# Altium PCB Ender-3.PcbDoc (part 2 of 14)
Units mil, origin at the board's own origin, x right, y up, seen from the top; angles counter-clockwise.
Board outline 3970.48 x 2769.68 mil, 2 copper layers (TopLayer, BottomLayer); 146 components, 136 nets, 669 pads, 614 vias.
Unrouted connection lines stored in the file: 1.
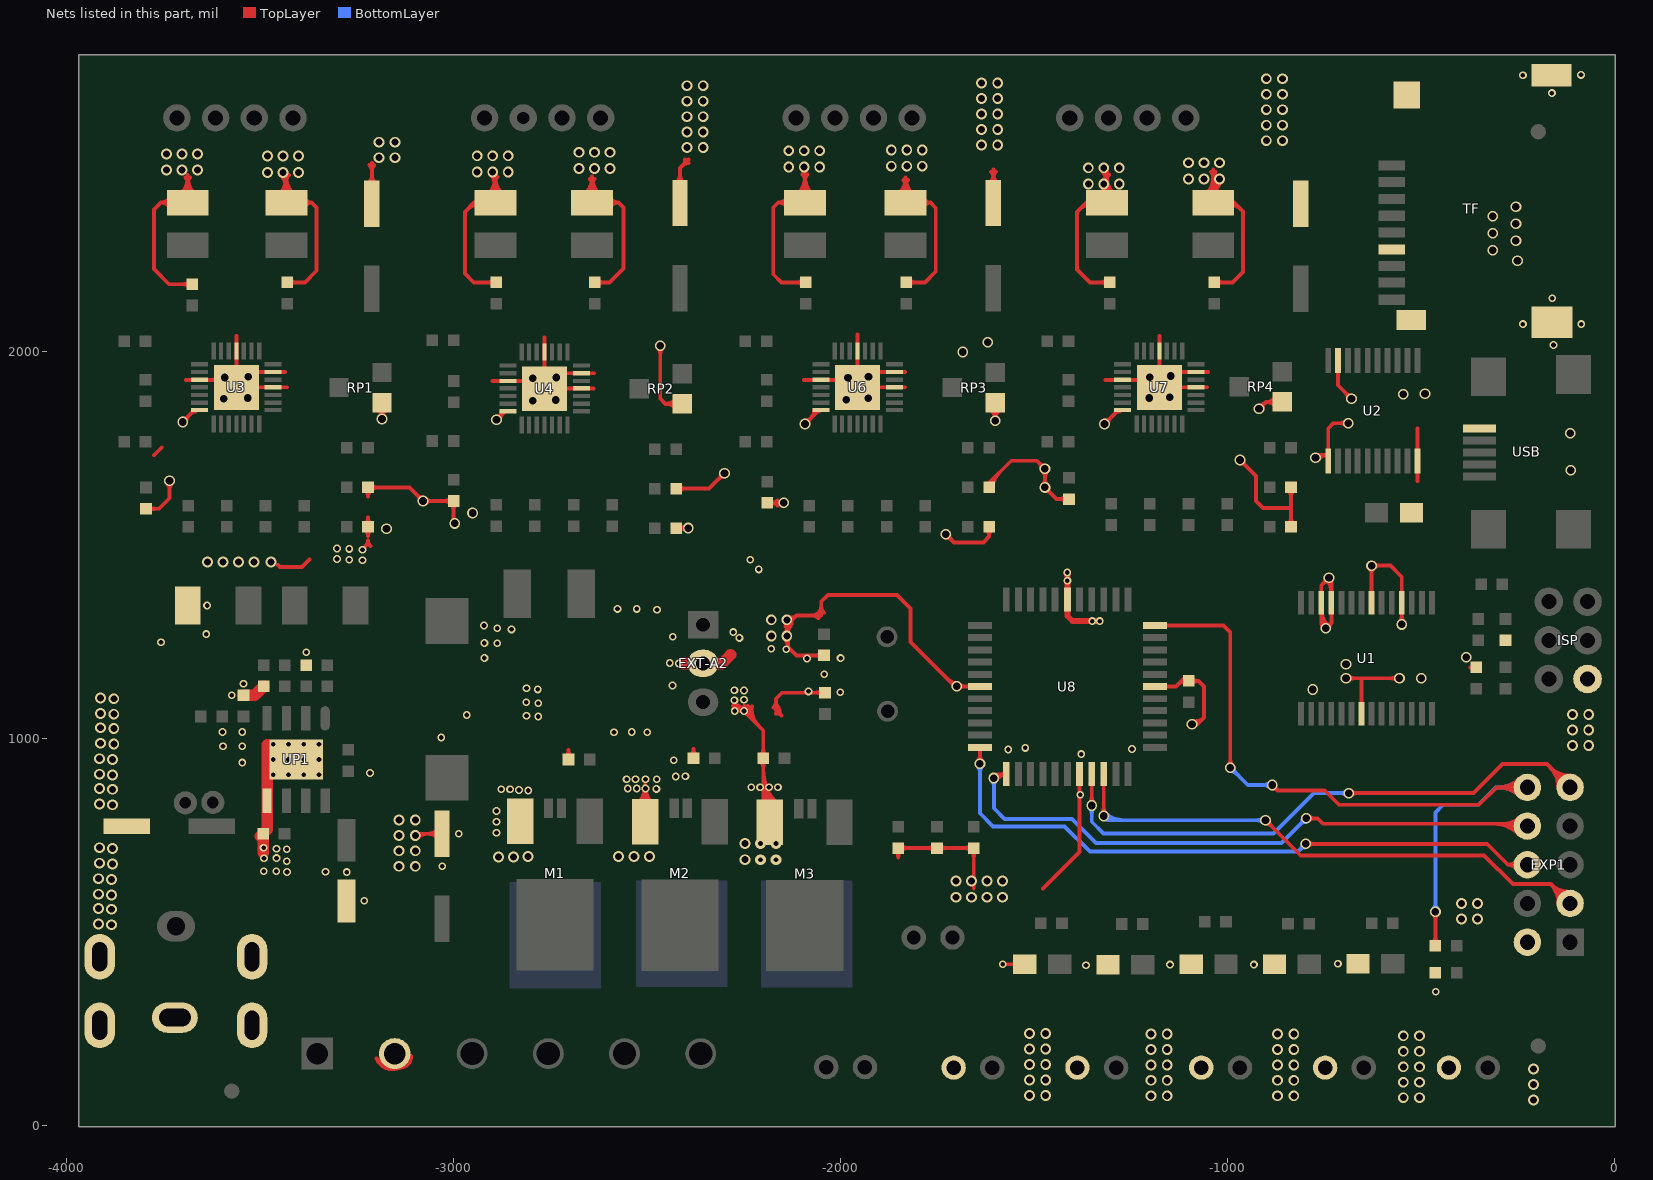
[diagram p2: the nets of this part, all layers, seen from the top]

## Via types
v1: diameter 28, hole 18, TopLayer to BottomLayer, tented both sides, 246 vias
v2: diameter 27.56, hole 19.68, TopLayer to BottomLayer, tented both sides, 196 vias
v3: diameter 20, hole 12, TopLayer to BottomLayer, tented both sides, 124 vias
v4: diameter 27.56, hole 11.81, TopLayer to BottomLayer, tented bottom, 16 vias
v5: diameter 27.56, hole 19.68, TopLayer to BottomLayer, 16 vias
v6: diameter 20, hole 12, TopLayer to BottomLayer, 12 vias
v7: diameter 28, hole 11.81, TopLayer to BottomLayer, tented both sides, 4 vias

## Nets (pads, with @x,y where several pads share a name; then routed paths per layer and width w, separated by ;. In a path a pad name is that pad's centre, name@x,y a point inside that pad or via, vN(x,y) a via of type N, cw(c..) or ccw(c..) an arc to the next point about the centre after c; other vN are vias at no path point) (continued)
EXT-A4: EXP1.10 LED1.1 U8.33 | length 2636.8
  TopLayer w10: U8.33@-1187.54,1292.84 -1010.54,1292.84 -992.54,1274.84 v2(-992.54,925.84) ; v2@-998.74,932.05 ccw(c-1013.73,947.04) -992.54,947.04 ccw(c-971.34,947.04) v2@-986.33,932.05 ; v2(-884.54,880.84) -870.54,866.84 ; v2@-884.1,872.07 cw(c-883.22,854.16) -870.54,866.84 ; v2@-875.77,880.41 ccw(c-857.86,879.52) -870.54,866.84 ; LED1.1@-469.61,472.91 ccw(c-486.68,489.98) -462.54,489.98 ccw(c-438.39,489.98) LED1.1@-455.46,472.91 ; v2@-468.74,547.63 cw(c-483.73,532.65) -462.54,532.65 cw(c-441.34,532.65) v2@-456.33,547.63 ; LED1.1@-462.54,465.84 v2(-462.54,553.84) ; EXP1.10@-246.29,853.32 ccw(c-298.24,801.37) -298.24,874.84 ccw(c-298.24,948.31) EXP1.10@-246.29,896.36 ; EXP1.10@-239.22,860.39 ccw(c-274.1,825.51) -274.1,874.84 ccw(c-274.1,924.17) EXP1.10@-239.22,889.29 ; EXP1.10@-224.77,874.84 -304.54,874.84 -349.54,829.84 -711.54,829.84 -748.54,866.84 -870.54,866.84 ; -1155.88,1292.84 cw(c-1155.88,1302.5) -1162.71,1295.67 ccw(c-1155.88,1302.5) -1155.88,1292.84 ; -1155.88,1292.84 ccw(c-1155.88,1283.19) -1162.71,1290.01 cw(c-1155.88,1283.19) -1155.88,1292.84
  BottomLayer w10: v2@-992.54,917.06 cw(c-992.54,895.87) -977.55,910.85 cw(c-962.56,925.84) v2@-983.76,925.84 ; v2(-992.54,925.84) -947.54,880.84 v2(-884.54,880.84) ; v2@-890.74,874.63 ccw(c-905.73,859.65) -905.73,880.84 ccw(c-905.73,902.04) v2@-890.74,887.05 ; v2@-468.74,560.05 ccw(c-483.73,575.04) -462.54,575.04 ccw(c-441.34,575.04) v2@-456.33,560.05 ; v2(-462.54,553.84) -462.54,809.84 -442.54,829.84 -351.54,829.84 -306.54,874.84 EXP1.10@-224.77,874.84 ; EXP1.10@-246.29,853.32 ccw(c-298.24,801.37) -298.24,874.84 ccw(c-298.24,948.31) EXP1.10@-246.29,896.36 ; EXP1.10@-239.22,860.39 ccw(c-274.1,825.51) -274.1,874.84 ccw(c-274.1,924.17) EXP1.10@-239.22,889.29
EXT-RX1: 
EXT-SCL: EXP1.9 U8.19 | length 1893.4
  TopLayer w10: v2(-1350.54,827.84) U8.19@-1350.54,908.84 ; v2(-686.54,859.84) -364.54,859.84 -289.54,934.84 -174.54,934.84 EXP1.9@-114.54,874.84 ; v2@-680.33,853.63 cw(c-665.34,838.65) -665.34,859.84 cw(c-665.34,881.04) v2@-680.33,866.05 ; EXP1.9@-144.97,874.84 ccw(c-218.44,874.84) -166.49,926.79 ccw(c-114.54,978.75) EXP1.9@-114.54,905.28 ; EXP1.9@-134.97,874.84 ccw(c-184.3,874.84) -149.42,909.72 ccw(c-114.54,944.61) EXP1.9@-114.54,895.28 ; -1350.54,849.04 cw(c-1371.73,849.04) -1356.74,834.05 ccw(c-1371.73,849.04) -1350.54,849.04 ; -1350.54,849.04 ccw(c-1329.34,849.04) -1344.33,834.05 cw(c-1329.34,849.04) -1350.54,849.04 ; -1350.54,877.19 cw(c-1340.88,877.19) -1347.71,884.01 ccw(c-1340.88,877.19) -1350.54,877.19 ; -1350.54,877.19 ccw(c-1360.19,877.19) -1353.36,884.01 cw(c-1360.19,877.19) -1350.54,877.19
  BottomLayer w10: v2(-1350.54,827.84) -1350.54,785.84 -1320.54,755.84 -880.54,755.84 -776.54,859.84 v2(-686.54,859.84) ; v2@-692.74,853.63 ccw(c-707.73,838.65) -707.73,859.84 ccw(c-707.73,881.04) v2@-692.74,866.05 ; -1350.54,806.65 cw(c-1329.34,806.65) -1344.33,821.63 ccw(c-1329.34,806.65) -1350.54,806.65 ; -1350.54,806.65 ccw(c-1371.73,806.65) -1356.74,821.63 cw(c-1371.73,806.65) -1350.54,806.65
EXT-SDA: EXP1.3 U8.20 | length 1928.1
  TopLayer w10: v2(-1319.54,800.84) U8.20@-1319.54,908.84 ; v2@-901.54,781.06 cw(c-901.54,759.87) -886.55,774.85 cw(c-871.56,789.84) v2@-892.76,789.84 ; v2(-901.54,789.84) -810.54,698.84 -336.54,698.84 -262.54,624.84 -164.54,624.84 ; EXP1.3@-144.96,575.68 ccw(c-211.85,577.52) -164.53,624.84 ; EXP1.3@-134.96,575.4 ccw(c-179.88,576.64) -148.1,608.41 ccw(c-116.33,640.18) EXP1.3@-115.1,595.27 ; EXP1.3@-115.37,605.26 cw(c-117.21,672.16) -164.53,624.84 ; EXP1.3@-114.54,574.84 -164.54,624.84 ; -1319.54,822.04 cw(c-1340.73,822.04) -1325.74,807.05 ccw(c-1340.73,822.04) -1319.54,822.04 ; -1319.54,822.04 ccw(c-1298.34,822.04) -1313.33,807.05 cw(c-1298.34,822.04) -1319.54,822.04 ; -1319.54,877.19 cw(c-1309.88,877.19) -1316.71,884.01 ccw(c-1309.88,877.19) -1319.54,877.19 ; -1319.54,877.19 ccw(c-1329.19,877.19) -1322.36,884.01 cw(c-1329.19,877.19) -1319.54,877.19
  BottomLayer w10: v2(-1319.54,800.84) -1308.54,789.84 ; v2@-1317.43,792.32 cw(c-1315.18,783.2) -1308.54,789.84 ; v2@-1316.73,792.52 cw(c-1314.49,785.89) -1309.54,790.84 cw(c-1304.59,795.79) v2@-1311.22,798.03 ; v2@-1311.01,798.74 ccw(c-1301.9,796.48) -1308.54,789.84 ; -1298.34,790.84 cw(c-1298.34,822.04) -1320.4,799.98 ccw(c-1295.93,824.45) -1295.93,789.84 ; -1274.2,790.84 cw(c-1274.2,846.18) -1313.33,807.05 ccw(c-1271.78,848.59) -1271.78,789.84 ; v2@-907.74,783.63 ccw(c-922.73,768.65) -922.73,789.84 ccw(c-922.73,811.04) v2@-907.74,796.05 ; v2(-901.54,789.84) -1308.54,789.84
EXT-TX1: EXP1.8 U8.12 | length 2066
  TopLayer w10: v2@-1604.6,899.44 cw(c-1588.58,890.49) -1588.58,908.84 ; v2@-1604.58,899.48 cw(c-1587.86,889.24) -1587.86,908.84 ; v2(-1603.54,898.84) -1593.54,908.84 ; v2@-1596.05,894.26 cw(c-1570.01,878.31) U8.12@-1570.01,908.84 ; v2@-1595.87,894.56 cw(c-1571.54,880.97) U8.12@-1571.54,908.84 -1593.54,908.84 ; v2(-796.54,794.84) -766.54,794.84 -752.54,780.84 -230.77,780.84 EXP1.8@-224.77,774.84 ; v2@-790.33,788.63 cw(c-775.34,773.65) -775.34,794.84 cw(c-775.34,816.04) v2@-790.33,801.05 ; -312.73,780.84 cw(c-312.73,686.89) EXP1.8@-246.29,753.32 ; -288.59,780.84 cw(c-288.59,711.03) EXP1.8@-239.22,760.39 ; -283.76,780.84 ccw(c-283.76,833.83) EXP1.8@-246.29,796.36 ; -264.44,780.84 cw(c-264.44,735.17) EXP1.8@-232.15,767.47 ; -1593.54,908.84 cw(c-1598.49,913.79) -1600.73,907.16 ccw(c-1598.49,913.79) -1593.54,908.84 ; -1593.54,908.84 ccw(c-1588.59,903.89) -1595.22,901.65 cw(c-1588.59,903.89) -1593.54,908.84 ; -1581.19,908.84 cw(c-1581.19,899.19) -1574.36,906.01 ccw(c-1581.19,899.19) -1581.19,908.84 ; -1581.19,908.84 ccw(c-1581.19,918.5) -1574.36,911.67 cw(c-1581.19,918.5) -1581.19,908.84
  BottomLayer w10: v2(-1603.54,898.84) -1603.54,820.84 -1575.54,792.84 -1401.54,792.84 -1339.54,730.84 -860.54,730.84 v2(-796.54,794.84) ; v2@-805.31,794.84 cw(c-826.51,794.84) -811.52,779.85 cw(c-796.54,764.87) v2@-796.54,786.06 ; -1603.54,877.65 cw(c-1582.34,877.65) -1597.33,892.63 ccw(c-1582.34,877.65) -1603.54,877.65 ; -1603.54,877.65 ccw(c-1624.73,877.65) -1609.74,892.63 cw(c-1624.73,877.65) -1603.54,877.65
FAN: 
FXT-RX1: EXP1.6 U8.11 | length 2281.7
  TopLayer w10: v2(-1639.54,935.84) U8.11@-1639.54,977.84 ; v2(-797.54,728.84) -328.54,728.84 -274.54,674.84 ; v2@-791.33,722.63 cw(c-776.34,707.65) -776.34,728.84 cw(c-776.34,750.04) v2@-791.33,735.05 ; EXP1.6@-251.86,660.98 ccw(c-274.53,649.37) -274.53,674.84 ; EXP1.6@-251.86,688.71 cw(c-274.53,700.31) -274.53,674.84 ; EXP1.6@-224.77,674.84 -274.54,674.84 ; v2@-1645.74,942.05 ccw(c-1660.73,957.04) -1639.54,957.04 ; v2@-1645.74,942.05 ccw(c-1660.73,957.04) -1639.54,957.04 ; v2@-1645.74,942.05 ccw(c-1660.73,957.04) -1639.54,957.04 ; v2@-1645.74,942.05 ccw(c-1660.73,957.04) -1639.54,957.04 ; v2@-1645.74,942.05 ccw(c-1660.73,957.04) -1639.54,957.04 ; v2@-1645.74,942.05 ccw(c-1660.73,957.04) -1639.54,957.04 ; v2@-1645.74,942.05 ccw(c-1660.73,957.04) -1639.54,957.04 ; v2@-1645.74,942.05 ccw(c-1660.73,957.04) -1639.54,957.04 ; v2@-1645.74,942.05 ccw(c-1660.73,957.04) -1639.54,957.04 ; U8.11@-1642.36,975.01 cw(c-1649.19,968.19) -1639.54,968.19 ; U8.11@-1642.36,975.01 cw(c-1649.19,968.19) -1639.54,968.19 ; U8.11@-1642.36,975.01 cw(c-1649.19,968.19) -1639.54,968.19 ; U8.11@-1642.36,975.01 cw(c-1649.19,968.19) -1639.54,968.19 ; U8.11@-1642.36,975.01 cw(c-1649.19,968.19) -1639.54,968.19 ; U8.11@-1642.36,975.01 cw(c-1649.19,968.19) -1639.54,968.19 ; U8.11@-1642.36,975.01 cw(c-1649.19,968.19) -1639.54,968.19 ; U8.11@-1642.36,975.01 cw(c-1649.19,968.19) -1639.54,968.19 ; U8.11@-1642.36,975.01 cw(c-1649.19,968.19) -1639.54,968.19 ; -1639.54,957.04 ccw(c-1618.34,957.04) v2@-1633.33,942.05 ; -1639.54,957.04 ccw(c-1618.34,957.04) v2@-1633.33,942.05 ; -1639.54,957.04 ccw(c-1618.34,957.04) v2@-1633.33,942.05 ; -1639.54,957.04 ccw(c-1618.34,957.04) v2@-1633.33,942.05 ; -1639.54,957.04 ccw(c-1618.34,957.04) v2@-1633.33,942.05 ; -1639.54,957.04 ccw(c-1618.34,957.04) v2@-1633.33,942.05 ; -1639.54,957.04 ccw(c-1618.34,957.04) v2@-1633.33,942.05 ; -1639.54,957.04 ccw(c-1618.34,957.04) v2@-1633.33,942.05 ; -1639.54,957.04 ccw(c-1618.34,957.04) v2@-1633.33,942.05 ; -1639.54,968.19 cw(c-1629.88,968.19) U8.11@-1636.71,975.01 ; -1639.54,968.19 cw(c-1629.88,968.19) U8.11@-1636.71,975.01 ; -1639.54,968.19 cw(c-1629.88,968.19) U8.11@-1636.71,975.01 ; -1639.54,968.19 cw(c-1629.88,968.19) U8.11@-1636.71,975.01 ; -1639.54,968.19 cw(c-1629.88,968.19) U8.11@-1636.71,975.01 ; -1639.54,968.19 cw(c-1629.88,968.19) U8.11@-1636.71,975.01 ; -1639.54,968.19 cw(c-1629.88,968.19) U8.11@-1636.71,975.01 ; -1639.54,968.19 cw(c-1629.88,968.19) U8.11@-1636.71,975.01 ; -1639.54,968.19 cw(c-1629.88,968.19) U8.11@-1636.71,975.01
  BottomLayer w10: v2(-1639.54,935.84) -1639.54,807.84 -1605.54,773.84 -1420.54,773.84 -1355.54,708.84 -817.54,708.84 v2(-797.54,728.84) ; v2@-806.31,728.84 cw(c-827.51,728.84) -812.52,713.85 cw(c-797.54,698.87) v2@-797.54,720.06 ; -1639.54,914.65 cw(c-1618.34,914.65) -1633.33,929.63 ccw(c-1618.34,914.65) -1639.54,914.65 ; -1639.54,914.65 ccw(c-1660.73,914.65) -1645.74,929.63 cw(c-1660.73,914.65) -1639.54,914.65
FXT-TX1: 
GND: 1K.2 B-MOT.2 C1.2 C2.2 C3.2 C4.2 C5.2 C6.2 C7.2 C8.2 C9.2 C11.1 C12.2 C13.2 C15.1 C16.2 C17.2 C19.1 C20.2 C21.2 C23.1 C24.2 C25.2 C28.2 C30.2 C31.2 C34.2 C36.2 C38.2 C40.2 C41.2 C42.2 C43.2 C44.2 C45.2 C50.2 C51.2 CP2.2 DP1.1 ETEMP.2 EXP1.2 EXT-A2.2 ISP.6 M1.3 M2.3 M3.3 pad.0@-162.54,2714.84 pad.0@-3520.39,259.94 pad.0@-3520.39,437.1 pad.0@-3719.63,279.99 pad.0@-3914.09,259.94 pad.0@-3914.09,437.1 PWR.1 R10.2 R11.2 R12.2 R14.2 R17.2 R20.2 R23.2 R25.2 R_P2.2 R_P3.2 R_P5.2 R_P6.2 RP1.2 RP2.2 RP3.2 RP4.2 S1.2 S2.2 S3.2 S4.2 S5.2 S6.2 S7.2 S8.2 TF.0 TF.6 U1.7 U1.18 U1.21 U1.25 U1.26 U2.1 U2.10 U2.19 U3.0 U3.3 U3.7 U3.18 U3.20 U3.25 U4.0 U4.3 U4.7 U4.18 U4.20 U4.25 U6.0 U6.3 U6.7 U6.18 U6.20 U6.25 U7.0 U7.3 U7.7 U7.18 U7.20 U7.25 U8.6 U8.18 U8.28 U8.39 UP1.0 UP1.5 USB.1 X-STOP.2 Y-STOP.2 Z-STOP.2 | length 62071